# EAGLE board SparkX_Micro_NFC_RFID_Tag-Panel (EAGLE 9.6.2), part 1 of 2
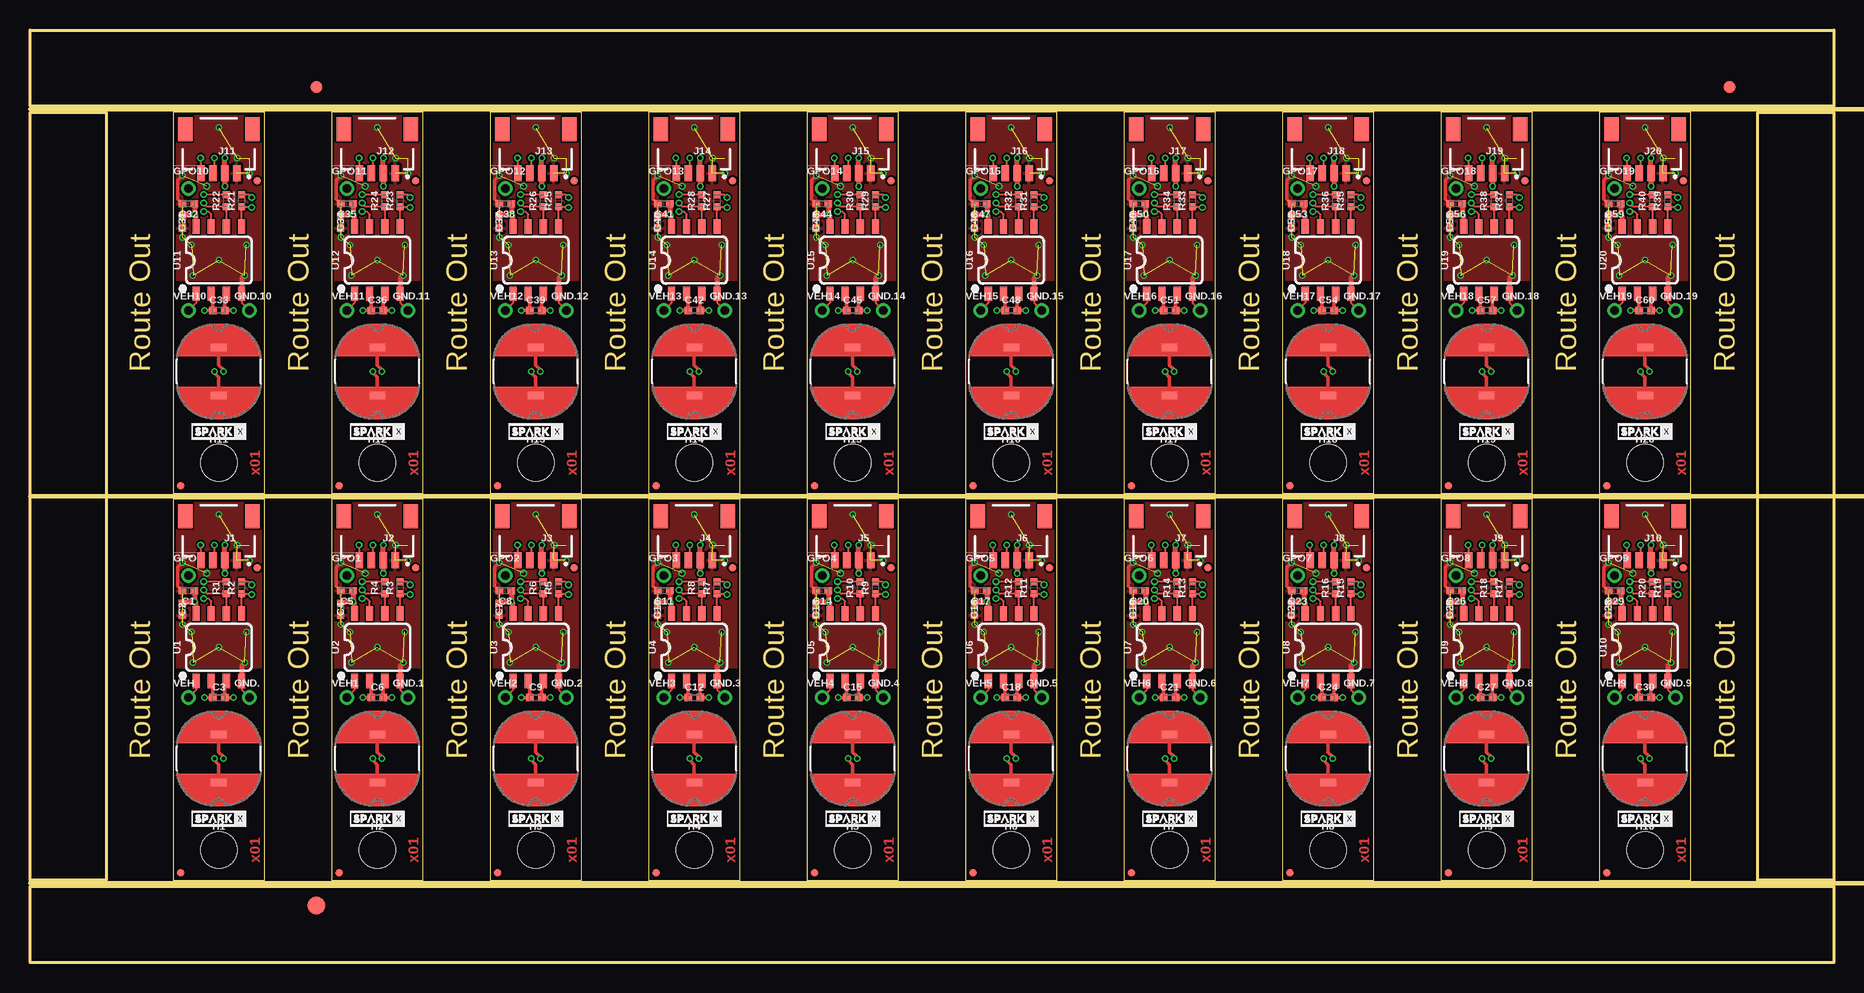
[diagram p0: board, top side]
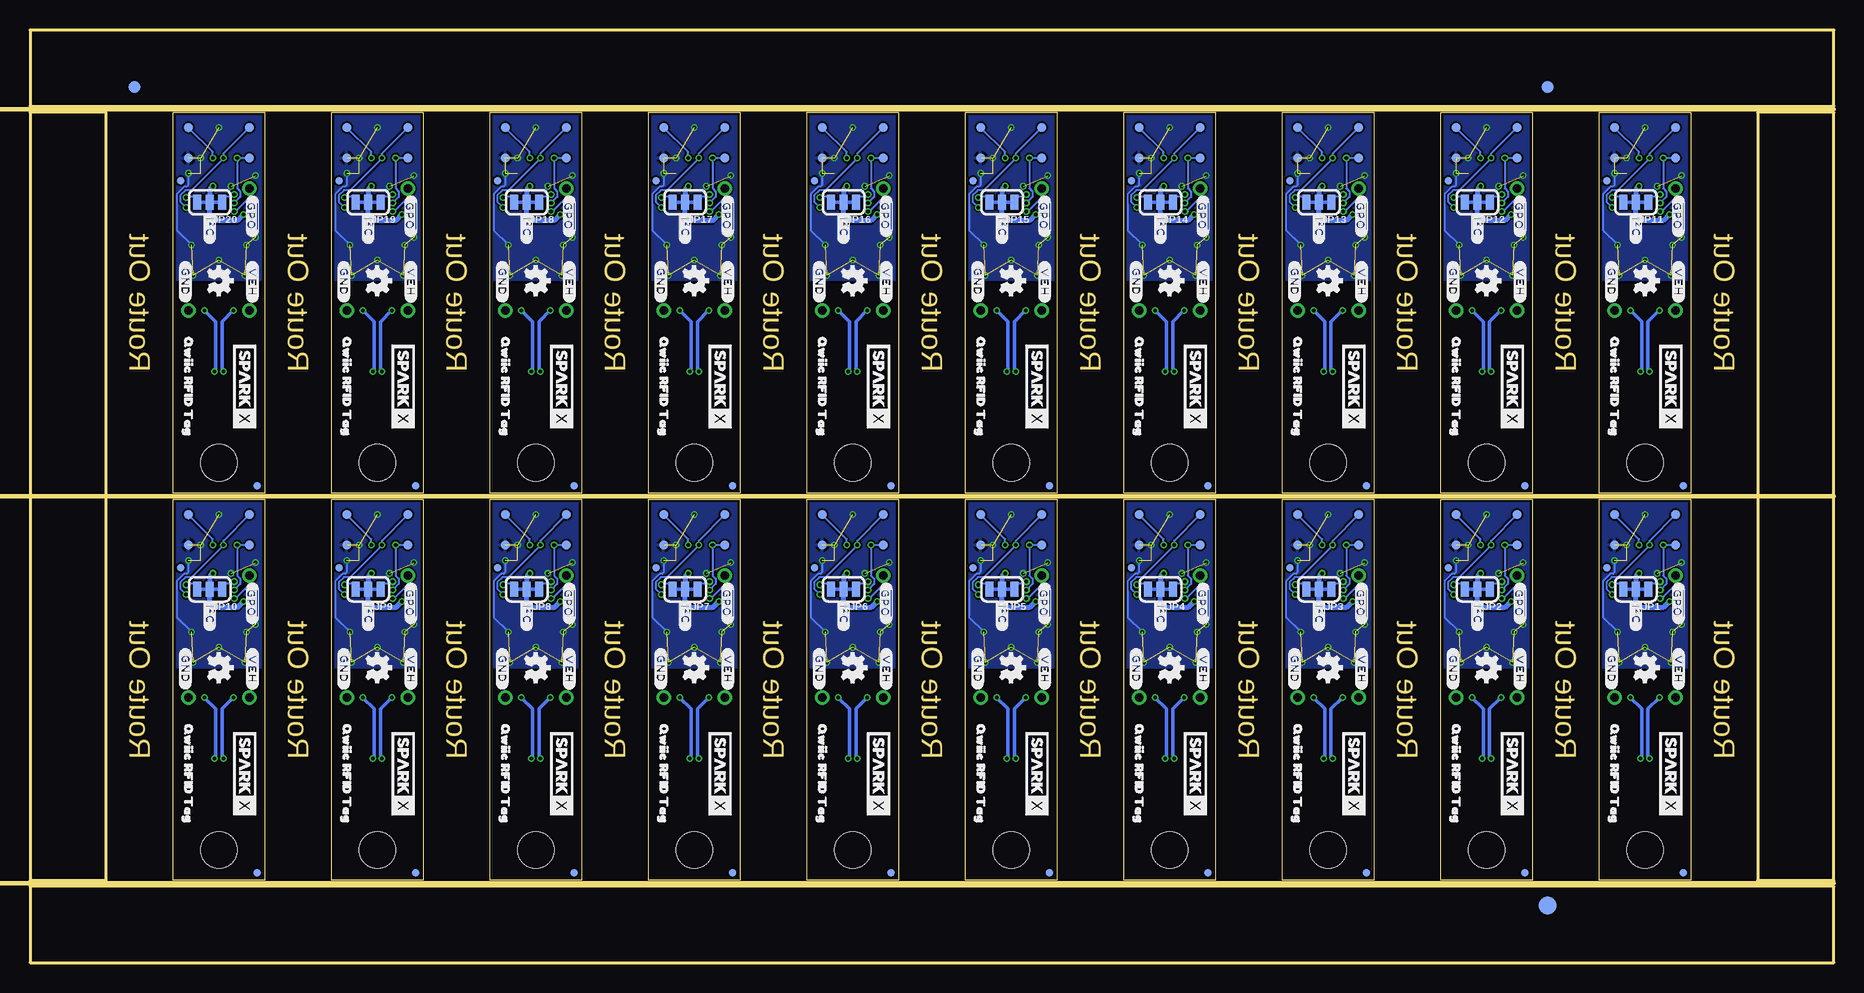
[diagram p1: board, bottom side, seen from below]

Size 150.37 x 77.72 mm. Coordinates in mm from the lower left corner, seen from the top.
Outline: 11.94,38.61 11.94,6.86 19.56,6.86 19.56,38.61 11.94,38.61
Outline: 25.15,38.61 25.15,6.86 32.77,6.86 32.77,38.61 25.15,38.61
Outline: 38.35,38.61 38.35,6.86 45.97,6.86 45.97,38.61 38.35,38.61
Outline: 51.56,38.61 51.56,6.86 59.18,6.86 59.18,38.61 51.56,38.61
Outline: 64.77,38.61 64.77,6.86 72.39,6.86 72.39,38.61 64.77,38.61
Outline: 77.98,38.61 77.98,6.86 85.6,6.86 85.6,38.61 77.98,38.61
Outline: 91.19,38.61 91.19,6.86 98.81,6.86 98.81,38.61 91.19,38.61
Outline: 104.39,38.61 104.39,6.86 112.01,6.86 112.01,38.61 104.39,38.61
Outline: 117.6,38.61 117.6,6.86 125.22,6.86 125.22,38.61 117.6,38.61
Outline: 130.81,38.61 130.81,6.86 138.43,6.86 138.43,38.61 130.81,38.61
Outline: 11.94,70.87 11.94,39.12 19.56,39.12 19.56,70.87 11.94,70.87
Outline: 25.15,70.87 25.15,39.12 32.77,39.12 32.77,70.87 25.15,70.87
Outline: 38.35,70.87 38.35,39.12 45.97,39.12 45.97,70.87 38.35,70.87
Outline: 51.56,70.87 51.56,39.12 59.18,39.12 59.18,70.87 51.56,70.87
Outline: 64.77,70.87 64.77,39.12 72.39,39.12 72.39,70.87 64.77,70.87
Outline: 77.98,70.87 77.98,39.12 85.6,39.12 85.6,70.87 77.98,70.87
Outline: 91.19,70.87 91.19,39.12 98.81,39.12 98.81,70.87 91.19,70.87
Outline: 104.39,70.87 104.39,39.12 112.01,39.12 112.01,70.87 104.39,70.87
Outline: 117.6,70.87 117.6,39.12 125.22,39.12 125.22,70.87 117.6,70.87
Outline: 130.81,70.87 130.81,39.12 138.43,39.12 138.43,70.87 130.81,70.87
Outline: 0,6.35 150.37,6.35 150.37,0 0,0 0,6.35
Outline: 144.02,70.87 150.37,70.87 150.37,6.86 144.02,6.86 144.02,70.87
Outline: 0,77.72 150.37,77.72 150.37,71.37 0,71.37 0,77.72
Outline: 0,70.87 6.35,70.87 6.35,6.86 0,6.86 0,70.87
Copper layers (1*16): Top 0.035mm / dielectric 1.5mm / Bottom 0.035mm
Design rules "SparkX_Micro_NFC_RFID_Tag": minimum track width 5mil, minimum drill 0.3mm, track to track 5mil, track to pad 5mil, pad to pad 5mil, via to via 5mil, smd to smd 5mil, copper to edge 7mil, drill to drill 7mil, minimum pad ring 5mil, minimum via ring 5mil, stop-mask expansion 2.5mil, vias tented up to drill 25mil, thermal gap 10mil
Milling: 3 lines

## Footprints (pad centres in the part's own frame; a part is rotated, then mirrored left to right if it is on the bottom)
PAD.03X.03 = smd 0.762 x 0.762: 1 0,0
1X01_1MM_NO_SILK = drill 0.7 pad 1.2: 1 0,0
W3102 = smd 1.27 x 0.635: 1 0,2; 2 0,-2
0402-TIGHT = smd 0.6 x 0.6: 1 -0.5,0; 2 0.5,0
FIDUCIAL-1X2 = smd 1 x 1: 1 0,0
FIDUCIAL-1.5X3 = smd 1.5 x 1.5: 1 0,0
FIDUCIAL-MICRO = smd 0.635 x 0.635: 1 0,0
STAND-OFF-TIGHT = hole 3.048: 0,0
JST04_1MM_RA = smd 0.6 x 1.35: 1 -1.5,0; 2 -0.5,0; 3 0.5,0; 4 1.5,0 | smd 1.2 x 2: NC1 2.8,-3.675; NC2 -2.8,-3.675
SMT-JUMPER_3_2-NC_TRACE_SILK = smd 0.66 x 1.27: 1 -1.041,0; 2 0,0; 3 1.041,0
SO08 = smd 0.6 x 1.2: 1 -1.905,-2.8; 2 -0.635,-2.8; 3 0.635,-2.8; 4 1.905,-2.8; 5 1.905,2.8; 6 0.635,2.8; 7 -0.635,2.8; 8 -1.905,2.8

## Placement (x,y rotation side)
3V1  TEST-POINT3  [PAD.03X.03]  31.5,37.34 0 bottom
3V2  TEST-POINT3  [PAD.03X.03]  44.7,37.34 0 bottom
3V3  TEST-POINT3  [PAD.03X.03]  18.29,37.34 0 bottom
3V4  TEST-POINT3  [PAD.03X.03]  57.91,37.34 0 bottom
3V5  TEST-POINT3  [PAD.03X.03]  71.12,37.34 0 bottom
3V6  TEST-POINT3  [PAD.03X.03]  84.33,37.34 0 bottom
3V7  TEST-POINT3  [PAD.03X.03]  97.54,37.34 0 bottom
3V8  TEST-POINT3  [PAD.03X.03]  110.74,37.34 0 bottom
3V9  TEST-POINT3  [PAD.03X.03]  123.95,37.34 0 bottom
3V10  TEST-POINT3  [PAD.03X.03]  137.16,37.34 0 bottom
3V11  TEST-POINT3  [PAD.03X.03]  18.29,69.6 0 bottom
3V12  TEST-POINT3  [PAD.03X.03]  31.5,69.6 0 bottom
3V13  TEST-POINT3  [PAD.03X.03]  44.7,69.6 0 bottom
3V14  TEST-POINT3  [PAD.03X.03]  57.91,69.6 0 bottom
3V15  TEST-POINT3  [PAD.03X.03]  71.12,69.6 0 bottom
3V16  TEST-POINT3  [PAD.03X.03]  84.33,69.6 0 bottom
3V17  TEST-POINT3  [PAD.03X.03]  97.54,69.6 0 bottom
3V18  TEST-POINT3  [PAD.03X.03]  110.74,69.6 0 bottom
3V19  TEST-POINT3  [PAD.03X.03]  123.95,69.6 0 bottom
3V20  TEST-POINT3  [PAD.03X.03]  137.16,69.6 0 bottom
!GPO!  [1X01_1MM_NO_SILK]  13.21,32.26 0 top
!GPO!1  [1X01_1MM_NO_SILK]  26.42,32.26 0 top
!GPO!2  [1X01_1MM_NO_SILK]  39.62,32.26 0 top
!GPO!3  [1X01_1MM_NO_SILK]  52.83,32.26 0 top
!GPO!4  [1X01_1MM_NO_SILK]  66.04,32.26 0 top
!GPO!5  [1X01_1MM_NO_SILK]  79.25,32.26 0 top
!GPO!6  [1X01_1MM_NO_SILK]  92.46,32.26 0 top
!GPO!7  [1X01_1MM_NO_SILK]  105.66,32.26 0 top
!GPO!8  [1X01_1MM_NO_SILK]  118.87,32.26 0 top
!GPO!9  [1X01_1MM_NO_SILK]  132.08,32.26 0 top
!GPO!10  [1X01_1MM_NO_SILK]  13.21,64.52 0 top
!GPO!11  [1X01_1MM_NO_SILK]  26.42,64.52 0 top
!GPO!12  [1X01_1MM_NO_SILK]  39.62,64.52 0 top
!GPO!13  [1X01_1MM_NO_SILK]  52.83,64.52 0 top
!GPO!14  [1X01_1MM_NO_SILK]  66.04,64.52 0 top
!GPO!15  [1X01_1MM_NO_SILK]  79.25,64.52 0 top
!GPO!16  [1X01_1MM_NO_SILK]  92.46,64.52 0 top
!GPO!17  [1X01_1MM_NO_SILK]  105.66,64.52 0 top
!GPO!18  [1X01_1MM_NO_SILK]  118.87,64.52 0 top
!GPO!19  [1X01_1MM_NO_SILK]  132.08,64.52 0 top
ANT  4.7μH  [W3102]  15.75,17.02 180 top
ANT1  4.7μH  [W3102]  28.96,17.02 180 top
ANT2  4.7μH  [W3102]  42.16,17.02 180 top
ANT3  4.7μH  [W3102]  55.37,17.02 180 top
ANT4  4.7μH  [W3102]  68.58,17.02 180 top
ANT5  4.7μH  [W3102]  81.79,17.02 180 top
ANT6  4.7μH  [W3102]  95,17.02 180 top
ANT7  4.7μH  [W3102]  108.2,17.02 180 top
ANT8  4.7μH  [W3102]  121.41,17.02 180 top
ANT9  4.7μH  [W3102]  134.62,17.02 180 top
ANT10  4.7μH  [W3102]  15.75,49.28 180 top
ANT11  4.7μH  [W3102]  28.96,49.28 180 top
ANT12  4.7μH  [W3102]  42.16,49.28 180 top
ANT13  4.7μH  [W3102]  55.37,49.28 180 top
ANT14  4.7μH  [W3102]  68.58,49.28 180 top
ANT15  4.7μH  [W3102]  81.79,49.28 180 top
ANT16  4.7μH  [W3102]  95,49.28 180 top
ANT17  4.7μH  [W3102]  108.2,49.28 180 top
ANT18  4.7μH  [W3102]  121.41,49.28 180 top
ANT19  4.7μH  [W3102]  134.62,49.28 180 top
C1  0.1uF  [0402-TIGHT]  13.21,30.99 180 top
C2  2.2uF  [0402-TIGHT]  12.7,29.46 270 top
C3  0.5pF  [0402-TIGHT]  15.75,22.1 0 top
C4  2.2uF  [0402-TIGHT]  25.91,29.46 270 top
C5  0.1uF  [0402-TIGHT]  26.42,30.99 180 top
C6  0.5pF  [0402-TIGHT]  28.96,22.1 0 top
C7  2.2uF  [0402-TIGHT]  39.12,29.46 270 top
C8  0.1uF  [0402-TIGHT]  39.62,30.99 180 top
C9  0.5pF  [0402-TIGHT]  42.16,22.1 0 top
C10  2.2uF  [0402-TIGHT]  52.32,29.46 270 top
C11  0.1uF  [0402-TIGHT]  52.83,30.99 180 top
C12  0.5pF  [0402-TIGHT]  55.37,22.1 0 top
C13  2.2uF  [0402-TIGHT]  65.53,29.46 270 top
C14  0.1uF  [0402-TIGHT]  66.04,30.99 180 top
C15  0.5pF  [0402-TIGHT]  68.58,22.1 0 top
C16  2.2uF  [0402-TIGHT]  78.74,29.46 270 top
C17  0.1uF  [0402-TIGHT]  79.25,30.99 180 top
C18  0.5pF  [0402-TIGHT]  81.79,22.1 0 top
C19  2.2uF  [0402-TIGHT]  91.95,29.46 270 top
C20  0.1uF  [0402-TIGHT]  92.46,30.99 180 top
C21  0.5pF  [0402-TIGHT]  95,22.1 0 top
C22  2.2uF  [0402-TIGHT]  105.16,29.46 270 top
C23  0.1uF  [0402-TIGHT]  105.66,30.99 180 top
C24  0.5pF  [0402-TIGHT]  108.2,22.1 0 top
C25  2.2uF  [0402-TIGHT]  118.36,29.46 270 top
C26  0.1uF  [0402-TIGHT]  118.87,30.99 180 top
C27  0.5pF  [0402-TIGHT]  121.41,22.1 0 top
C28  2.2uF  [0402-TIGHT]  131.57,29.46 270 top
C29  0.1uF  [0402-TIGHT]  132.08,30.99 180 top
C30  0.5pF  [0402-TIGHT]  134.62,22.1 0 top
C31  2.2uF  [0402-TIGHT]  12.7,61.72 270 top
C32  0.1uF  [0402-TIGHT]  13.21,63.25 180 top
C33  0.5pF  [0402-TIGHT]  15.75,54.36 0 top
C34  2.2uF  [0402-TIGHT]  25.91,61.72 270 top
C35  0.1uF  [0402-TIGHT]  26.42,63.25 180 top
C36  0.5pF  [0402-TIGHT]  28.96,54.36 0 top
C37  2.2uF  [0402-TIGHT]  39.12,61.72 270 top
C38  0.1uF  [0402-TIGHT]  39.62,63.25 180 top
C39  0.5pF  [0402-TIGHT]  42.16,54.36 0 top
C40  2.2uF  [0402-TIGHT]  52.32,61.72 270 top
C41  0.1uF  [0402-TIGHT]  52.83,63.25 180 top
C42  0.5pF  [0402-TIGHT]  55.37,54.36 0 top
C43  2.2uF  [0402-TIGHT]  65.53,61.72 270 top
C44  0.1uF  [0402-TIGHT]  66.04,63.25 180 top
C45  0.5pF  [0402-TIGHT]  68.58,54.36 0 top
C46  2.2uF  [0402-TIGHT]  78.74,61.72 270 top
C47  0.1uF  [0402-TIGHT]  79.25,63.25 180 top
C48  0.5pF  [0402-TIGHT]  81.79,54.36 0 top
C49  2.2uF  [0402-TIGHT]  91.95,61.72 270 top
C50  0.1uF  [0402-TIGHT]  92.46,63.25 180 top
C51  0.5pF  [0402-TIGHT]  95,54.36 0 top
C52  2.2uF  [0402-TIGHT]  105.16,61.72 270 top
C53  0.1uF  [0402-TIGHT]  105.66,63.25 180 top
C54  0.5pF  [0402-TIGHT]  108.2,54.36 0 top
C55  2.2uF  [0402-TIGHT]  118.36,61.72 270 top
C56  0.1uF  [0402-TIGHT]  118.87,63.25 180 top
C57  0.5pF  [0402-TIGHT]  121.41,54.36 0 top
C58  2.2uF  [0402-TIGHT]  131.57,61.72 270 top
C59  0.1uF  [0402-TIGHT]  132.08,63.25 180 top
C60  0.5pF  [0402-TIGHT]  134.62,54.36 0 top
E$1  [FIDUCIAL-1X2]  23.88,72.96 0 top
E$2  [FIDUCIAL-1X2]  23.88,72.96 0 bottom
E$3  [FIDUCIAL-1X2]  141.67,72.96 0 top
E$4  [FIDUCIAL-1X2]  141.67,72.96 0 bottom
E$5  [FIDUCIAL-1.5X3]  23.88,4.76 0 top
E$6  [FIDUCIAL-1.5X3]  23.88,4.76 0 bottom
FD1  FIDUCIALUFIDUCIAL  [FIDUCIAL-MICRO]  18.92,32.89 0 top
FD2  FIDUCIALUFIDUCIAL  [FIDUCIAL-MICRO]  18.92,32.89 0 bottom
FD3  FIDUCIALUFIDUCIAL  [FIDUCIAL-MICRO]  12.57,7.49 0 top
FD4  FIDUCIALUFIDUCIAL  [FIDUCIAL-MICRO]  12.57,7.49 0 bottom
FD5  FIDUCIALUFIDUCIAL  [FIDUCIAL-MICRO]  32.13,32.89 0 top
FD6  FIDUCIALUFIDUCIAL  [FIDUCIAL-MICRO]  32.13,32.89 0 bottom
FD7  FIDUCIALUFIDUCIAL  [FIDUCIAL-MICRO]  25.78,7.49 0 top
FD8  FIDUCIALUFIDUCIAL  [FIDUCIAL-MICRO]  25.78,7.49 0 bottom
FD9  FIDUCIALUFIDUCIAL  [FIDUCIAL-MICRO]  45.34,32.89 0 top
FD10  FIDUCIALUFIDUCIAL  [FIDUCIAL-MICRO]  45.34,32.89 0 bottom
FD11  FIDUCIALUFIDUCIAL  [FIDUCIAL-MICRO]  38.99,7.49 0 top
FD12  FIDUCIALUFIDUCIAL  [FIDUCIAL-MICRO]  38.99,7.49 0 bottom
FD13  FIDUCIALUFIDUCIAL  [FIDUCIAL-MICRO]  58.55,32.89 0 top
FD14  FIDUCIALUFIDUCIAL  [FIDUCIAL-MICRO]  58.55,32.89 0 bottom
FD15  FIDUCIALUFIDUCIAL  [FIDUCIAL-MICRO]  52.2,7.49 0 top
FD16  FIDUCIALUFIDUCIAL  [FIDUCIAL-MICRO]  52.2,7.49 0 bottom
FD17  FIDUCIALUFIDUCIAL  [FIDUCIAL-MICRO]  71.75,32.89 0 top
FD18  FIDUCIALUFIDUCIAL  [FIDUCIAL-MICRO]  71.75,32.89 0 bottom
FD19  FIDUCIALUFIDUCIAL  [FIDUCIAL-MICRO]  65.41,7.49 0 top
FD20  FIDUCIALUFIDUCIAL  [FIDUCIAL-MICRO]  65.41,7.49 0 bottom
FD21  FIDUCIALUFIDUCIAL  [FIDUCIAL-MICRO]  84.96,32.89 0 top
FD22  FIDUCIALUFIDUCIAL  [FIDUCIAL-MICRO]  84.96,32.89 0 bottom
FD23  FIDUCIALUFIDUCIAL  [FIDUCIAL-MICRO]  78.61,7.49 0 top
FD24  FIDUCIALUFIDUCIAL  [FIDUCIAL-MICRO]  78.61,7.49 0 bottom
FD25  FIDUCIALUFIDUCIAL  [FIDUCIAL-MICRO]  98.17,32.89 0 top
FD26  FIDUCIALUFIDUCIAL  [FIDUCIAL-MICRO]  98.17,32.89 0 bottom
FD27  FIDUCIALUFIDUCIAL  [FIDUCIAL-MICRO]  91.82,7.49 0 top
FD28  FIDUCIALUFIDUCIAL  [FIDUCIAL-MICRO]  91.82,7.49 0 bottom
FD29  FIDUCIALUFIDUCIAL  [FIDUCIAL-MICRO]  111.38,32.89 0 top
FD30  FIDUCIALUFIDUCIAL  [FIDUCIAL-MICRO]  111.38,32.89 0 bottom
FD31  FIDUCIALUFIDUCIAL  [FIDUCIAL-MICRO]  105.03,7.49 0 top
FD32  FIDUCIALUFIDUCIAL  [FIDUCIAL-MICRO]  105.03,7.49 0 bottom
FD33  FIDUCIALUFIDUCIAL  [FIDUCIAL-MICRO]  124.59,32.89 0 top
FD34  FIDUCIALUFIDUCIAL  [FIDUCIAL-MICRO]  124.59,32.89 0 bottom
FD35  FIDUCIALUFIDUCIAL  [FIDUCIAL-MICRO]  118.24,7.49 0 top
FD36  FIDUCIALUFIDUCIAL  [FIDUCIAL-MICRO]  118.24,7.49 0 bottom
FD37  FIDUCIALUFIDUCIAL  [FIDUCIAL-MICRO]  137.79,32.89 0 top
FD38  FIDUCIALUFIDUCIAL  [FIDUCIAL-MICRO]  137.79,32.89 0 bottom
FD39  FIDUCIALUFIDUCIAL  [FIDUCIAL-MICRO]  131.44,7.49 0 top
FD40  FIDUCIALUFIDUCIAL  [FIDUCIAL-MICRO]  131.44,7.49 0 bottom
FD41  FIDUCIALUFIDUCIAL  [FIDUCIAL-MICRO]  18.92,65.15 0 top
FD42  FIDUCIALUFIDUCIAL  [FIDUCIAL-MICRO]  18.92,65.15 0 bottom
FD43  FIDUCIALUFIDUCIAL  [FIDUCIAL-MICRO]  12.57,39.75 0 top
FD44  FIDUCIALUFIDUCIAL  [FIDUCIAL-MICRO]  12.57,39.75 0 bottom
FD45  FIDUCIALUFIDUCIAL  [FIDUCIAL-MICRO]  32.13,65.15 0 top
FD46  FIDUCIALUFIDUCIAL  [FIDUCIAL-MICRO]  32.13,65.15 0 bottom
FD47  FIDUCIALUFIDUCIAL  [FIDUCIAL-MICRO]  25.78,39.75 0 top
FD48  FIDUCIALUFIDUCIAL  [FIDUCIAL-MICRO]  25.78,39.75 0 bottom
FD49  FIDUCIALUFIDUCIAL  [FIDUCIAL-MICRO]  45.34,65.15 0 top
FD50  FIDUCIALUFIDUCIAL  [FIDUCIAL-MICRO]  45.34,65.15 0 bottom
FD51  FIDUCIALUFIDUCIAL  [FIDUCIAL-MICRO]  38.99,39.75 0 top
FD52  FIDUCIALUFIDUCIAL  [FIDUCIAL-MICRO]  38.99,39.75 0 bottom
FD53  FIDUCIALUFIDUCIAL  [FIDUCIAL-MICRO]  58.55,65.15 0 top
FD54  FIDUCIALUFIDUCIAL  [FIDUCIAL-MICRO]  58.55,65.15 0 bottom
FD55  FIDUCIALUFIDUCIAL  [FIDUCIAL-MICRO]  52.2,39.75 0 top
FD56  FIDUCIALUFIDUCIAL  [FIDUCIAL-MICRO]  52.2,39.75 0 bottom
FD57  FIDUCIALUFIDUCIAL  [FIDUCIAL-MICRO]  71.75,65.15 0 top
FD58  FIDUCIALUFIDUCIAL  [FIDUCIAL-MICRO]  71.75,65.15 0 bottom
FD59  FIDUCIALUFIDUCIAL  [FIDUCIAL-MICRO]  65.41,39.75 0 top
FD60  FIDUCIALUFIDUCIAL  [FIDUCIAL-MICRO]  65.41,39.75 0 bottom
FD61  FIDUCIALUFIDUCIAL  [FIDUCIAL-MICRO]  84.96,65.15 0 top
FD62  FIDUCIALUFIDUCIAL  [FIDUCIAL-MICRO]  84.96,65.15 0 bottom
FD63  FIDUCIALUFIDUCIAL  [FIDUCIAL-MICRO]  78.61,39.75 0 top
FD64  FIDUCIALUFIDUCIAL  [FIDUCIAL-MICRO]  78.61,39.75 0 bottom
FD65  FIDUCIALUFIDUCIAL  [FIDUCIAL-MICRO]  98.17,65.15 0 top
FD66  FIDUCIALUFIDUCIAL  [FIDUCIAL-MICRO]  98.17,65.15 0 bottom
FD67  FIDUCIALUFIDUCIAL  [FIDUCIAL-MICRO]  91.82,39.75 0 top
FD68  FIDUCIALUFIDUCIAL  [FIDUCIAL-MICRO]  91.82,39.75 0 bottom
FD69  FIDUCIALUFIDUCIAL  [FIDUCIAL-MICRO]  111.38,65.15 0 top
FD70  FIDUCIALUFIDUCIAL  [FIDUCIAL-MICRO]  111.38,65.15 0 bottom
FD71  FIDUCIALUFIDUCIAL  [FIDUCIAL-MICRO]  105.03,39.75 0 top
FD72  FIDUCIALUFIDUCIAL  [FIDUCIAL-MICRO]  105.03,39.75 0 bottom
FD73  FIDUCIALUFIDUCIAL  [FIDUCIAL-MICRO]  124.59,65.15 0 top
FD74  FIDUCIALUFIDUCIAL  [FIDUCIAL-MICRO]  124.59,65.15 0 bottom
FD75  FIDUCIALUFIDUCIAL  [FIDUCIAL-MICRO]  118.24,39.75 0 top
FD76  FIDUCIALUFIDUCIAL  [FIDUCIAL-MICRO]  118.24,39.75 0 bottom
FD77  FIDUCIALUFIDUCIAL  [FIDUCIAL-MICRO]  137.79,65.15 0 top
FD78  FIDUCIALUFIDUCIAL  [FIDUCIAL-MICRO]  137.79,65.15 0 bottom
FD79  FIDUCIALUFIDUCIAL  [FIDUCIAL-MICRO]  131.44,39.75 0 top
FD80  FIDUCIALUFIDUCIAL  [FIDUCIAL-MICRO]  131.44,39.75 0 bottom
GND  TEST-POINT3  [PAD.03X.03]  18.29,34.8 0 bottom
GND1  TEST-POINT3  [PAD.03X.03]  31.5,34.8 0 bottom
GND2  TEST-POINT3  [PAD.03X.03]  44.7,34.8 0 bottom
GND3  TEST-POINT3  [PAD.03X.03]  57.91,34.8 0 bottom
GND4  TEST-POINT3  [PAD.03X.03]  71.12,34.8 0 bottom
GND5  TEST-POINT3  [PAD.03X.03]  84.33,34.8 0 bottom
GND6  TEST-POINT3  [PAD.03X.03]  97.54,34.8 0 bottom
GND7  TEST-POINT3  [PAD.03X.03]  110.74,34.8 0 bottom
GND8  TEST-POINT3  [PAD.03X.03]  123.95,34.8 0 bottom
GND9  TEST-POINT3  [PAD.03X.03]  137.16,34.8 0 bottom
GND10  TEST-POINT3  [PAD.03X.03]  18.29,67.06 0 bottom
GND11  TEST-POINT3  [PAD.03X.03]  31.5,67.06 0 bottom
GND12  TEST-POINT3  [PAD.03X.03]  44.7,67.06 0 bottom
GND13  TEST-POINT3  [PAD.03X.03]  57.91,67.06 0 bottom
GND14  TEST-POINT3  [PAD.03X.03]  71.12,67.06 0 bottom
GND15  TEST-POINT3  [PAD.03X.03]  84.33,67.06 0 bottom
GND16  TEST-POINT3  [PAD.03X.03]  97.54,67.06 0 bottom
GND17  TEST-POINT3  [PAD.03X.03]  110.74,67.06 0 bottom
GND18  TEST-POINT3  [PAD.03X.03]  123.95,67.06 0 bottom
GND19  TEST-POINT3  [PAD.03X.03]  137.16,67.06 0 bottom
GND.  [1X01_1MM_NO_SILK]  18.29,22.1 0 top
GND.1  [1X01_1MM_NO_SILK]  31.5,22.1 0 top
GND.2  [1X01_1MM_NO_SILK]  44.7,22.1 0 top
GND.3  [1X01_1MM_NO_SILK]  57.91,22.1 0 top
GND.4  [1X01_1MM_NO_SILK]  71.12,22.1 0 top
GND.5  [1X01_1MM_NO_SILK]  84.33,22.1 0 top
GND.6  [1X01_1MM_NO_SILK]  97.54,22.1 0 top
GND.7  [1X01_1MM_NO_SILK]  110.74,22.1 0 top
GND.8  [1X01_1MM_NO_SILK]  123.95,22.1 0 top
GND.9  [1X01_1MM_NO_SILK]  137.16,22.1 0 top
GND.10  [1X01_1MM_NO_SILK]  18.29,54.36 0 top
GND.11  [1X01_1MM_NO_SILK]  31.5,54.36 0 top
GND.12  [1X01_1MM_NO_SILK]  44.7,54.36 0 top
GND.13  [1X01_1MM_NO_SILK]  57.91,54.36 0 top
GND.14  [1X01_1MM_NO_SILK]  71.12,54.36 0 top
GND.15  [1X01_1MM_NO_SILK]  84.33,54.36 0 top
GND.16  [1X01_1MM_NO_SILK]  97.54,54.36 0 top
GND.17  [1X01_1MM_NO_SILK]  110.74,54.36 0 top
GND.18  [1X01_1MM_NO_SILK]  123.95,54.36 0 top
GND.19  [1X01_1MM_NO_SILK]  137.16,54.36 0 top
H1  STAND-OFFTIGHT  [STAND-OFF-TIGHT]  15.75,9.4 0 top
H2  STAND-OFFTIGHT  [STAND-OFF-TIGHT]  28.96,9.4 0 top
H3  STAND-OFFTIGHT  [STAND-OFF-TIGHT]  42.16,9.4 0 top
H4  STAND-OFFTIGHT  [STAND-OFF-TIGHT]  55.37,9.4 0 top
H5  STAND-OFFTIGHT  [STAND-OFF-TIGHT]  68.58,9.4 0 top
H6  STAND-OFFTIGHT  [STAND-OFF-TIGHT]  81.79,9.4 0 top
H7  STAND-OFFTIGHT  [STAND-OFF-TIGHT]  95,9.4 0 top
H8  STAND-OFFTIGHT  [STAND-OFF-TIGHT]  108.2,9.4 0 top
H9  STAND-OFFTIGHT  [STAND-OFF-TIGHT]  121.41,9.4 0 top
H10  STAND-OFFTIGHT  [STAND-OFF-TIGHT]  134.62,9.4 0 top
H11  STAND-OFFTIGHT  [STAND-OFF-TIGHT]  15.75,41.66 0 top
H12  STAND-OFFTIGHT  [STAND-OFF-TIGHT]  28.96,41.66 0 top
H13  STAND-OFFTIGHT  [STAND-OFF-TIGHT]  42.16,41.66 0 top
H14  STAND-OFFTIGHT  [STAND-OFF-TIGHT]  55.37,41.66 0 top
H15  STAND-OFFTIGHT  [STAND-OFF-TIGHT]  68.58,41.66 0 top
H16  STAND-OFFTIGHT  [STAND-OFF-TIGHT]  81.79,41.66 0 top
H17  STAND-OFFTIGHT  [STAND-OFF-TIGHT]  95,41.66 0 top
H18  STAND-OFFTIGHT  [STAND-OFF-TIGHT]  108.2,41.66 0 top
H19  STAND-OFFTIGHT  [STAND-OFF-TIGHT]  121.41,41.66 0 top
H20  STAND-OFFTIGHT  [STAND-OFF-TIGHT]  134.62,41.66 0 top
J1  QWIIC_RIGHT_ANGLE  [JST04_1MM_RA]  15.75,33.53 180 top
J2  QWIIC_RIGHT_ANGLE  [JST04_1MM_RA]  28.96,33.53 180 top
J3  QWIIC_RIGHT_ANGLE  [JST04_1MM_RA]  42.16,33.53 180 top
J4  QWIIC_RIGHT_ANGLE  [JST04_1MM_RA]  55.37,33.53 180 top
J5  QWIIC_RIGHT_ANGLE  [JST04_1MM_RA]  68.58,33.53 180 top
J6  QWIIC_RIGHT_ANGLE  [JST04_1MM_RA]  81.79,33.53 180 top
J7  QWIIC_RIGHT_ANGLE  [JST04_1MM_RA]  95,33.53 180 top
J8  QWIIC_RIGHT_ANGLE  [JST04_1MM_RA]  108.2,33.53 180 top
J9  QWIIC_RIGHT_ANGLE  [JST04_1MM_RA]  121.41,33.53 180 top
J10  QWIIC_RIGHT_ANGLE  [JST04_1MM_RA]  134.62,33.53 180 top
J11  QWIIC_RIGHT_ANGLE  [JST04_1MM_RA]  15.75,65.79 180 top
J12  QWIIC_RIGHT_ANGLE  [JST04_1MM_RA]  28.96,65.79 180 top
J13  QWIIC_RIGHT_ANGLE  [JST04_1MM_RA]  42.16,65.79 180 top
J14  QWIIC_RIGHT_ANGLE  [JST04_1MM_RA]  55.37,65.79 180 top
J15  QWIIC_RIGHT_ANGLE  [JST04_1MM_RA]  68.58,65.79 180 top
J16  QWIIC_RIGHT_ANGLE  [JST04_1MM_RA]  81.79,65.79 180 top
J17  QWIIC_RIGHT_ANGLE  [JST04_1MM_RA]  95,65.79 180 top
J18  QWIIC_RIGHT_ANGLE  [JST04_1MM_RA]  108.2,65.79 180 top
J19  QWIIC_RIGHT_ANGLE  [JST04_1MM_RA]  121.41,65.79 180 top
J20  QWIIC_RIGHT_ANGLE  [JST04_1MM_RA]  134.62,65.79 180 top
JP1  JUMPER-SMT_3_2-NC_TRACE_SILK  [SMT-JUMPER_3_2-NC_TRACE_SILK]  16.51,31.12 180 bottom
JP2  JUMPER-SMT_3_2-NC_TRACE_SILK  [SMT-JUMPER_3_2-NC_TRACE_SILK]  29.72,31.12 180 bottom
JP3  JUMPER-SMT_3_2-NC_TRACE_SILK  [SMT-JUMPER_3_2-NC_TRACE_SILK]  42.93,31.12 180 bottom
JP4  JUMPER-SMT_3_2-NC_TRACE_SILK  [SMT-JUMPER_3_2-NC_TRACE_SILK]  56.13,31.12 180 bottom
JP5  JUMPER-SMT_3_2-NC_TRACE_SILK  [SMT-JUMPER_3_2-NC_TRACE_SILK]  69.34,31.12 180 bottom
JP6  JUMPER-SMT_3_2-NC_TRACE_SILK  [SMT-JUMPER_3_2-NC_TRACE_SILK]  82.55,31.12 180 bottom
JP7  JUMPER-SMT_3_2-NC_TRACE_SILK  [SMT-JUMPER_3_2-NC_TRACE_SILK]  95.76,31.12 180 bottom
JP8  JUMPER-SMT_3_2-NC_TRACE_SILK  [SMT-JUMPER_3_2-NC_TRACE_SILK]  108.97,31.12 180 bottom
JP9  JUMPER-SMT_3_2-NC_TRACE_SILK  [SMT-JUMPER_3_2-NC_TRACE_SILK]  122.17,31.12 180 bottom
JP10  JUMPER-SMT_3_2-NC_TRACE_SILK  [SMT-JUMPER_3_2-NC_TRACE_SILK]  135.38,31.12 180 bottom
JP11  JUMPER-SMT_3_2-NC_TRACE_SILK  [SMT-JUMPER_3_2-NC_TRACE_SILK]  16.51,63.37 180 bottom
JP12  JUMPER-SMT_3_2-NC_TRACE_SILK  [SMT-JUMPER_3_2-NC_TRACE_SILK]  29.72,63.37 180 bottom
JP13  JUMPER-SMT_3_2-NC_TRACE_SILK  [SMT-JUMPER_3_2-NC_TRACE_SILK]  42.93,63.37 180 bottom
JP14  JUMPER-SMT_3_2-NC_TRACE_SILK  [SMT-JUMPER_3_2-NC_TRACE_SILK]  56.13,63.37 180 bottom
JP15  JUMPER-SMT_3_2-NC_TRACE_SILK  [SMT-JUMPER_3_2-NC_TRACE_SILK]  69.34,63.37 180 bottom
JP16  JUMPER-SMT_3_2-NC_TRACE_SILK  [SMT-JUMPER_3_2-NC_TRACE_SILK]  82.55,63.37 180 bottom
JP17  JUMPER-SMT_3_2-NC_TRACE_SILK  [SMT-JUMPER_3_2-NC_TRACE_SILK]  95.76,63.37 180 bottom
JP18  JUMPER-SMT_3_2-NC_TRACE_SILK  [SMT-JUMPER_3_2-NC_TRACE_SILK]  108.97,63.37 180 bottom
JP19  JUMPER-SMT_3_2-NC_TRACE_SILK  [SMT-JUMPER_3_2-NC_TRACE_SILK]  122.17,63.37 180 bottom
JP20  JUMPER-SMT_3_2-NC_TRACE_SILK  [SMT-JUMPER_3_2-NC_TRACE_SILK]  135.38,63.37 180 bottom
LOGO1  OSHW-LOGOMINI  [OSHW-LOGO-MINI]  28.96,24.57 270 bottom
LOGO2  OSHW-LOGOMINI  [OSHW-LOGO-MINI]  15.75,24.57 270 bottom
LOGO3  OSHW-LOGOMINI  [OSHW-LOGO-MINI]  42.16,24.57 270 bottom
LOGO4  OSHW-LOGOMINI  [OSHW-LOGO-MINI]  55.37,24.57 270 bottom
LOGO5  OSHW-LOGOMINI  [OSHW-LOGO-MINI]  68.58,24.57 270 bottom
LOGO6  OSHW-LOGOMINI  [OSHW-LOGO-MINI]  81.79,24.57 270 bottom
LOGO7  OSHW-LOGOMINI  [OSHW-LOGO-MINI]  95,24.57 270 bottom
LOGO8  OSHW-LOGOMINI  [OSHW-LOGO-MINI]  108.2,24.57 270 bottom
LOGO9  OSHW-LOGOMINI  [OSHW-LOGO-MINI]  121.41,24.57 270 bottom
LOGO10  OSHW-LOGOMINI  [OSHW-LOGO-MINI]  134.62,24.57 270 bottom
LOGO11  OSHW-LOGOMINI  [OSHW-LOGO-MINI]  15.75,56.83 270 bottom
LOGO12  OSHW-LOGOMINI  [OSHW-LOGO-MINI]  28.96,56.83 270 bottom
LOGO13  OSHW-LOGOMINI  [OSHW-LOGO-MINI]  42.16,56.83 270 bottom
LOGO14  OSHW-LOGOMINI  [OSHW-LOGO-MINI]  55.37,56.83 270 bottom
LOGO15  OSHW-LOGOMINI  [OSHW-LOGO-MINI]  68.58,56.83 270 bottom
LOGO16  OSHW-LOGOMINI  [OSHW-LOGO-MINI]  81.79,56.83 270 bottom
LOGO17  OSHW-LOGOMINI  [OSHW-LOGO-MINI]  95,56.83 270 bottom
LOGO18  OSHW-LOGOMINI  [OSHW-LOGO-MINI]  108.2,56.83 270 bottom
LOGO19  OSHW-LOGOMINI  [OSHW-LOGO-MINI]  121.41,56.83 270 bottom
LOGO20  OSHW-LOGOMINI  [OSHW-LOGO-MINI]  134.62,56.83 270 bottom
R1  2.2k  [0402-TIGHT]  16.38,31.24 90 top
R2  2.2k  [0402-TIGHT]  17.65,31.24 90 top
R3  2.2k  [0402-TIGHT]  30.86,31.24 90 top
R4  2.2k  [0402-TIGHT]  29.59,31.24 90 top
R5  2.2k  [0402-TIGHT]  44.07,31.24 90 top
R6  2.2k  [0402-TIGHT]  42.8,31.24 90 top
R7  2.2k  [0402-TIGHT]  57.28,31.24 90 top
R8  2.2k  [0402-TIGHT]  56.01,31.24 90 top
R9  2.2k  [0402-TIGHT]  70.48,31.24 90 top
R10  2.2k  [0402-TIGHT]  69.22,31.24 90 top
R11  2.2k  [0402-TIGHT]  83.69,31.24 90 top
R12  2.2k  [0402-TIGHT]  82.42,31.24 90 top
R13  2.2k  [0402-TIGHT]  96.9,31.24 90 top
R14  2.2k  [0402-TIGHT]  95.63,31.24 90 top
R15  2.2k  [0402-TIGHT]  110.11,31.24 90 top
R16  2.2k  [0402-TIGHT]  108.84,31.24 90 top
R17  2.2k  [0402-TIGHT]  123.32,31.24 90 top
R18  2.2k  [0402-TIGHT]  122.05,31.24 90 top
R19  2.2k  [0402-TIGHT]  136.53,31.24 90 top
R20  2.2k  [0402-TIGHT]  135.25,31.24 90 top
R21  2.2k  [0402-TIGHT]  17.65,63.5 90 top
R22  2.2k  [0402-TIGHT]  16.38,63.5 90 top
R23  2.2k  [0402-TIGHT]  30.86,63.5 90 top
R24  2.2k  [0402-TIGHT]  29.59,63.5 90 top
R25  2.2k  [0402-TIGHT]  44.07,63.5 90 top
R26  2.2k  [0402-TIGHT]  42.8,63.5 90 top
R27  2.2k  [0402-TIGHT]  57.28,63.5 90 top
R28  2.2k  [0402-TIGHT]  56.01,63.5 90 top
R29  2.2k  [0402-TIGHT]  70.48,63.5 90 top
R30  2.2k  [0402-TIGHT]  69.22,63.5 90 top
R31  2.2k  [0402-TIGHT]  83.69,63.5 90 top
R32  2.2k  [0402-TIGHT]  82.42,63.5 90 top
R33  2.2k  [0402-TIGHT]  96.9,63.5 90 top
R34  2.2k  [0402-TIGHT]  95.63,63.5 90 top
R35  2.2k  [0402-TIGHT]  110.11,63.5 90 top
R36  2.2k  [0402-TIGHT]  108.84,63.5 90 top
R37  2.2k  [0402-TIGHT]  123.32,63.5 90 top
R38  2.2k  [0402-TIGHT]  122.05,63.5 90 top
R39  2.2k  [0402-TIGHT]  136.53,63.5 90 top
R40  2.2k  [0402-TIGHT]  135.25,63.5 90 top
SCL  TEST-POINT3  [PAD.03X.03]  13.21,34.8 0 bottom
SCL1  TEST-POINT3  [PAD.03X.03]  26.42,34.8 0 bottom
SCL2  TEST-POINT3  [PAD.03X.03]  39.62,34.8 0 bottom
SCL3  TEST-POINT3  [PAD.03X.03]  52.83,34.8 0 bottom
SCL4  TEST-POINT3  [PAD.03X.03]  66.04,34.8 0 bottom
SCL5  TEST-POINT3  [PAD.03X.03]  79.25,34.8 0 bottom
SCL6  TEST-POINT3  [PAD.03X.03]  92.46,34.8 0 bottom
SCL7  TEST-POINT3  [PAD.03X.03]  105.66,34.8 0 bottom
SCL8  TEST-POINT3  [PAD.03X.03]  118.87,34.8 0 bottom
SCL9  TEST-POINT3  [PAD.03X.03]  132.08,34.8 0 bottom
SCL10  TEST-POINT3  [PAD.03X.03]  13.21,67.06 0 bottom
SCL11  TEST-POINT3  [PAD.03X.03]  26.42,67.06 0 bottom
SCL12  TEST-POINT3  [PAD.03X.03]  39.62,67.06 0 bottom
SCL13  TEST-POINT3  [PAD.03X.03]  52.83,67.06 0 bottom
SCL14  TEST-POINT3  [PAD.03X.03]  66.04,67.06 0 bottom
SCL15  TEST-POINT3  [PAD.03X.03]  79.25,67.06 0 bottom
SCL16  TEST-POINT3  [PAD.03X.03]  92.46,67.06 0 bottom
SCL17  TEST-POINT3  [PAD.03X.03]  105.66,67.06 0 bottom
SCL18  TEST-POINT3  [PAD.03X.03]  118.87,67.06 0 bottom
SCL19  TEST-POINT3  [PAD.03X.03]  132.08,67.06 0 bottom
SDA  TEST-POINT3  [PAD.03X.03]  13.21,37.34 0 bottom
SDA1  TEST-POINT3  [PAD.03X.03]  26.42,37.34 0 bottom
SDA2  TEST-POINT3  [PAD.03X.03]  39.62,37.34 0 bottom
SDA3  TEST-POINT3  [PAD.03X.03]  52.83,37.34 0 bottom
SDA4  TEST-POINT3  [PAD.03X.03]  66.04,37.34 0 bottom
SDA5  TEST-POINT3  [PAD.03X.03]  79.25,37.34 0 bottom
SDA6  TEST-POINT3  [PAD.03X.03]  92.46,37.34 0 bottom
SDA7  TEST-POINT3  [PAD.03X.03]  105.66,37.34 0 bottom
SDA8  TEST-POINT3  [PAD.03X.03]  118.87,37.34 0 bottom
SDA9  TEST-POINT3  [PAD.03X.03]  132.08,37.34 0 bottom
SDA10  TEST-POINT3  [PAD.03X.03]  13.21,69.6 0 bottom
SDA11  TEST-POINT3  [PAD.03X.03]  26.42,69.6 0 bottom
SDA12  TEST-POINT3  [PAD.03X.03]  39.62,69.6 0 bottom
SDA13  TEST-POINT3  [PAD.03X.03]  52.83,69.6 0 bottom
SDA14  TEST-POINT3  [PAD.03X.03]  66.04,69.6 0 bottom
SDA15  TEST-POINT3  [PAD.03X.03]  79.25,69.6 0 bottom
SDA16  TEST-POINT3  [PAD.03X.03]  92.46,69.6 0 bottom
SDA17  TEST-POINT3  [PAD.03X.03]  105.66,69.6 0 bottom
SDA18  TEST-POINT3  [PAD.03X.03]  118.87,69.6 0 bottom
SDA19  TEST-POINT3  [PAD.03X.03]  132.08,69.6 0 bottom
U1  ST25DV64KC  [SO08]  15.75,26.29 0 top
U2  ST25DV64KC  [SO08]  28.96,26.29 0 top
U3  ST25DV64KC  [SO08]  42.16,26.29 0 top
U4  ST25DV64KC  [SO08]  55.37,26.29 0 top
U5  ST25DV64KC  [SO08]  68.58,26.29 0 top
U6  ST25DV64KC  [SO08]  81.79,26.29 0 top
U7  ST25DV64KC  [SO08]  95,26.29 0 top
U8  ST25DV64KC  [SO08]  108.2,26.29 0 top
U9  ST25DV64KC  [SO08]  121.41,26.29 0 top
U10  ST25DV64KC  [SO08]  134.62,26.29 0 top
U11  ST25DV64KC  [SO08]  15.75,58.55 0 top
U12  ST25DV64KC  [SO08]  28.96,58.55 0 top
U13  ST25DV64KC  [SO08]  42.16,58.55 0 top
U14  ST25DV64KC  [SO08]  55.37,58.55 0 top
U15  ST25DV64KC  [SO08]  68.58,58.55 0 top
U16  ST25DV64KC  [SO08]  81.79,58.55 0 top
U17  ST25DV64KC  [SO08]  95,58.55 0 top
U18  ST25DV64KC  [SO08]  108.2,58.55 0 top
U19  ST25DV64KC  [SO08]  121.41,58.55 0 top
U20  ST25DV64KC  [SO08]  134.62,58.55 0 top
U$1  SPARKX-LOGO2  [SPARKX-TINY]  15.75,12 0 top
U$2  [##GPO##0]  12.95,31.62 270 bottom
U$3  [QWIIC_RFID_TAG0]  18.29,15.75 270 bottom
U$4  [#VEH#0]  12.95,26.16 270 bottom
U$5  [#I�C#0]  16.51,30.35 270 bottom
U$6  [#GND#0]  18.54,26.16 270 bottom
U$7  SPARKX-LOGO2  [SPARKX-TINY]  28.96,12 0 top
U$8  SPARKX-LOGO3  [SPARKX-SMALL]  26.8,15.75 270 bottom
U$9  [#I�C#0]  29.72,30.35 270 bottom
U$10  [##GPO##0]  26.16,31.62 270 bottom
U$11  [#VEH#0]  26.16,26.16 270 bottom
U$12  [#GND#0]  31.75,26.16 270 bottom
U$13  [QWIIC_RFID_TAG0]  31.5,15.75 270 bottom
U$14  SPARKX-LOGO2  [SPARKX-TINY]  42.16,12 0 top
U$15  SPARKX-LOGO3  [SPARKX-SMALL]  40.01,15.75 270 bottom
U$16  [#I�C#0]  42.93,30.35 270 bottom
U$17  [##GPO##0]  39.37,31.62 270 bottom
U$18  [#VEH#0]  39.37,26.16 270 bottom
U$19  [#GND#0]  44.96,26.16 270 bottom
U$20  SPARKX-LOGO3  [SPARKX-SMALL]  13.59,15.75 270 bottom
U$21  [QWIIC_RFID_TAG0]  44.7,15.75 270 bottom
U$22  SPARKX-LOGO2  [SPARKX-TINY]  55.37,12 0 top
U$23  SPARKX-LOGO3  [SPARKX-SMALL]  53.21,15.75 270 bottom
U$24  [#I�C#0]  56.13,30.35 270 bottom
U$25  [##GPO##0]  52.58,31.62 270 bottom
U$26  [#VEH#0]  52.58,26.16 270 bottom
U$27  [#GND#0]  58.17,26.16 270 bottom
U$28  [QWIIC_RFID_TAG0]  57.91,15.75 270 bottom
U$29  SPARKX-LOGO2  [SPARKX-TINY]  68.58,12 0 top
U$30  SPARKX-LOGO3  [SPARKX-SMALL]  66.42,15.75 270 bottom
U$31  [#I�C#0]  69.34,30.35 270 bottom
U$32  [##GPO##0]  65.79,31.62 270 bottom
U$33  [#VEH#0]  65.79,26.16 270 bottom
U$34  [#GND#0]  71.37,26.16 270 bottom
U$35  [QWIIC_RFID_TAG0]  71.12,15.75 270 bottom
U$36  SPARKX-LOGO2  [SPARKX-TINY]  81.79,12 0 top
U$37  SPARKX-LOGO3  [SPARKX-SMALL]  79.63,15.75 270 bottom
U$38  [#I�C#0]  82.55,30.35 270 bottom
U$39  [##GPO##0]  78.99,31.62 270 bottom
U$40  [#VEH#0]  78.99,26.16 270 bottom
U$41  [#GND#0]  84.58,26.16 270 bottom
U$42  [QWIIC_RFID_TAG0]  84.33,15.75 270 bottom
U$43  SPARKX-LOGO2  [SPARKX-TINY]  95,12 0 top
U$44  SPARKX-LOGO3  [SPARKX-SMALL]  92.84,15.75 270 bottom
U$45  [#I�C#0]  95.76,30.35 270 bottom
U$46  [##GPO##0]  92.2,31.62 270 bottom
U$47  [#VEH#0]  92.2,26.16 270 bottom
U$48  [#GND#0]  97.79,26.16 270 bottom
U$49  [QWIIC_RFID_TAG0]  97.54,15.75 270 bottom
U$50  SPARKX-LOGO2  [SPARKX-TINY]  108.2,12 0 top
U$51  SPARKX-LOGO3  [SPARKX-SMALL]  106.05,15.75 270 bottom
U$52  [#I�C#0]  108.97,30.35 270 bottom
U$53  [##GPO##0]  105.41,31.62 270 bottom
U$54  [#VEH#0]  105.41,26.16 270 bottom
U$55  [#GND#0]  111,26.16 270 bottom
U$56  [QWIIC_RFID_TAG0]  110.74,15.75 270 bottom
U$57  SPARKX-LOGO2  [SPARKX-TINY]  121.41,12 0 top
U$58  SPARKX-LOGO3  [SPARKX-SMALL]  119.25,15.75 270 bottom
U$59  [#I�C#0]  122.17,30.35 270 bottom
U$60  [##GPO##0]  118.62,31.62 270 bottom
U$61  [#VEH#0]  118.62,26.16 270 bottom
U$62  [#GND#0]  124.21,26.16 270 bottom
U$63  [QWIIC_RFID_TAG0]  123.95,15.75 270 bottom
U$64  SPARKX-LOGO2  [SPARKX-TINY]  134.62,12 0 top
U$65  SPARKX-LOGO3  [SPARKX-SMALL]  132.46,15.75 270 bottom
U$66  [#I�C#0]  135.38,30.35 270 bottom
U$67  [##GPO##0]  131.83,31.62 270 bottom
U$68  [#VEH#0]  131.83,26.16 270 bottom
U$69  [#GND#0]  137.41,26.16 270 bottom
U$70  [QWIIC_RFID_TAG0]  137.16,15.75 270 bottom
U$71  SPARKX-LOGO2  [SPARKX-TINY]  15.75,44.26 0 top
U$72  SPARKX-LOGO3  [SPARKX-SMALL]  13.59,48.01 270 bottom
U$73  [#I�C#0]  16.51,62.61 270 bottom
U$74  [##GPO##0]  12.95,63.88 270 bottom
U$75  [#VEH#0]  12.95,58.42 270 bottom
U$76  [#GND#0]  18.54,58.42 270 bottom
U$77  [QWIIC_RFID_TAG0]  18.29,48.01 270 bottom
U$78  SPARKX-LOGO2  [SPARKX-TINY]  28.96,44.26 0 top
U$79  SPARKX-LOGO3  [SPARKX-SMALL]  26.8,48.01 270 bottom
U$80  [#I�C#0]  29.72,62.61 270 bottom
U$81  [##GPO##0]  26.16,63.88 270 bottom
U$82  [#VEH#0]  26.16,58.42 270 bottom
U$83  [#GND#0]  31.75,58.42 270 bottom
U$84  [QWIIC_RFID_TAG0]  31.5,48.01 270 bottom
U$85  SPARKX-LOGO2  [SPARKX-TINY]  42.16,44.26 0 top
U$86  SPARKX-LOGO3  [SPARKX-SMALL]  40.01,48.01 270 bottom
U$87  [#I�C#0]  42.93,62.61 270 bottom
U$88  [##GPO##0]  39.37,63.88 270 bottom
U$89  [#VEH#0]  39.37,58.42 270 bottom
U$90  [#GND#0]  44.96,58.42 270 bottom
U$91  [QWIIC_RFID_TAG0]  44.7,48.01 270 bottom
U$92  SPARKX-LOGO2  [SPARKX-TINY]  55.37,44.26 0 top
U$93  SPARKX-LOGO3  [SPARKX-SMALL]  53.21,48.01 270 bottom
U$94  [#I�C#0]  56.13,62.61 270 bottom
U$95  [##GPO##0]  52.58,63.88 270 bottom
U$96  [#VEH#0]  52.58,58.42 270 bottom
U$97  [#GND#0]  58.17,58.42 270 bottom
U$98  [QWIIC_RFID_TAG0]  57.91,48.01 270 bottom
U$99  SPARKX-LOGO2  [SPARKX-TINY]  68.58,44.26 0 top
U$100  SPARKX-LOGO3  [SPARKX-SMALL]  66.42,48.01 270 bottom
U$101  [#I�C#0]  69.34,62.61 270 bottom
U$102  [##GPO##0]  65.79,63.88 270 bottom
U$103  [#VEH#0]  65.79,58.42 270 bottom
U$104  [#GND#0]  71.37,58.42 270 bottom
U$105  [QWIIC_RFID_TAG0]  71.12,48.01 270 bottom
U$106  SPARKX-LOGO2  [SPARKX-TINY]  81.79,44.26 0 top
U$107  SPARKX-LOGO3  [SPARKX-SMALL]  79.63,48.01 270 bottom
U$108  [#I�C#0]  82.55,62.61 270 bottom
U$109  [##GPO##0]  78.99,63.88 270 bottom
U$110  [#VEH#0]  78.99,58.42 270 bottom
U$111  [#GND#0]  84.58,58.42 270 bottom
U$112  [QWIIC_RFID_TAG0]  84.33,48.01 270 bottom
U$113  SPARKX-LOGO2  [SPARKX-TINY]  95,44.26 0 top
U$114  SPARKX-LOGO3  [SPARKX-SMALL]  92.84,48.01 270 bottom
U$115  [#I�C#0]  95.76,62.61 270 bottom
U$116  [##GPO##0]  92.2,63.88 270 bottom
U$117  [#VEH#0]  92.2,58.42 270 bottom
U$118  [#GND#0]  97.79,58.42 270 bottom
U$119  [QWIIC_RFID_TAG0]  97.54,48.01 270 bottom
U$120  SPARKX-LOGO2  [SPARKX-TINY]  108.2,44.26 0 top
U$121  SPARKX-LOGO3  [SPARKX-SMALL]  106.05,48.01 270 bottom
U$122  [#I�C#0]  108.97,62.61 270 bottom
U$123  [##GPO##0]  105.41,63.88 270 bottom
U$124  [#VEH#0]  105.41,58.42 270 bottom
U$125  [#GND#0]  111,58.42 270 bottom
U$126  [QWIIC_RFID_TAG0]  110.74,48.01 270 bottom
U$127  SPARKX-LOGO2  [SPARKX-TINY]  121.41,44.26 0 top
U$128  SPARKX-LOGO3  [SPARKX-SMALL]  119.25,48.01 270 bottom
U$129  [#I�C#0]  122.17,62.61 270 bottom
U$130  [##GPO##0]  118.62,63.88 270 bottom
U$131  [#VEH#0]  118.62,58.42 270 bottom
U$132  [#GND#0]  124.21,58.42 270 bottom
U$133  [QWIIC_RFID_TAG0]  123.95,48.01 270 bottom
U$134  SPARKX-LOGO2  [SPARKX-TINY]  134.62,44.26 0 top
U$135  SPARKX-LOGO3  [SPARKX-SMALL]  132.46,48.01 270 bottom
U$136  [#I�C#0]  135.38,62.61 270 bottom
U$137  [##GPO##0]  131.83,63.88 270 bottom
U$138  [#VEH#0]  131.83,58.42 270 bottom
U$139  [#GND#0]  137.41,58.42 270 bottom
U$140  [QWIIC_RFID_TAG0]  137.16,48.01 270 bottom
VEH  [1X01_1MM_NO_SILK]  13.21,22.1 0 top
VEH1  [1X01_1MM_NO_SILK]  26.42,22.1 0 top
VEH2  [1X01_1MM_NO_SILK]  39.62,22.1 0 top
VEH3  [1X01_1MM_NO_SILK]  52.83,22.1 0 top
VEH4  [1X01_1MM_NO_SILK]  66.04,22.1 0 top
VEH5  [1X01_1MM_NO_SILK]  79.25,22.1 0 top
VEH6  [1X01_1MM_NO_SILK]  92.46,22.1 0 top
VEH7  [1X01_1MM_NO_SILK]  105.66,22.1 0 top
VEH8  [1X01_1MM_NO_SILK]  118.87,22.1 0 top
VEH9  [1X01_1MM_NO_SILK]  132.08,22.1 0 top
VEH10  [1X01_1MM_NO_SILK]  13.21,54.36 0 top
VEH11  [1X01_1MM_NO_SILK]  26.42,54.36 0 top
VEH12  [1X01_1MM_NO_SILK]  39.62,54.36 0 top
VEH13  [1X01_1MM_NO_SILK]  52.83,54.36 0 top
VEH14  [1X01_1MM_NO_SILK]  66.04,54.36 0 top
VEH15  [1X01_1MM_NO_SILK]  79.25,54.36 0 top
VEH16  [1X01_1MM_NO_SILK]  92.46,54.36 0 top
VEH17  [1X01_1MM_NO_SILK]  105.66,54.36 0 top
VEH18  [1X01_1MM_NO_SILK]  118.87,54.36 0 top
VEH19  [1X01_1MM_NO_SILK]  132.08,54.36 0 top

## Library data of the parts
3V1-3V20 !GPO! !GPO!1-!GPO!19 GND GND1-GND19 GND. GND.1-GND.19 SCL SCL1-SCL19 SDA SDA1-SDA19 VEH VEH1-VEH19 = SparkFun-Connectors
ANT ANT1-ANT19 = SparkFun-RF; PROD_ID: ANT-16333
C1 C5 C8 C11 C14 C17 C20 C23 C26 C29 C32 C35 C38 C41 C44 C47 C50 C53 C56 C59 = SparkFun-Capacitors; PROD_ID: CAP-14993
C2 C4 C7 C10 C13 C16 C19 C22 C25 C28 C31 C34 C37 C40 C43 C46 C49 C52 C55 C58 = SparkFun-Capacitors; PROD_ID: CAP-14232
C3 C6 C9 C12 C15 C18 C21 C24 C27 C30 C33 C36 C39 C42 C45 C48 C51 C54 C57 C60 = SparkFun-Capacitors; PROD_ID: CAP-14362
E$1-E$4 FD1-FD80 LOGO1-LOGO20 = SparkFun-Aesthetics
E$5 E$6 = SparkFun-Retired
H1-H20 = SparkFun-Hardware
J1-J20 = SparkFun-Connectors; PROD_ID: CONN-13694
JP1-JP20 = SparkFun-Jumpers
R1-R40 = SparkFun-Resistors; PROD_ID: RES-14341
U1-U20 = SparkFun-RF; PROD_ID: IC-16315
U$1 U$7 U$8 U$14 U$15 U$20 U$22 U$23 U$29 U$30 U$36 U$37 U$43 U$44 U$50 U$51 U$57 U$58 U$64 U$65 U$71 U$72 U$78 U$79 U$85 U$86 U$92 U$93 U$99 U$100 U$106 U$107 U$113 U$114 U$120 U$121 U$127 U$128 U$134 U$135 = SparkX
U$2-U$6 U$9-U$13 U$16-U$19 U$21 U$24-U$28 U$31-U$35 U$38-U$42 U$45-U$49 U$52-U$56 U$59-U$63 U$66-U$70 U$73-U$77 U$80-U$84 U$87-U$91 U$94-U$98 U$101-U$105 U$108-U$112 U$115-U$119 U$122-U$126 U$129-U$133 U$136-U$140 = output

## Nets
3.3V: 3V3.1 C1.1 C2.1 J1.2 JP1.2 U1.8
3.3V1: 3V1.1 C4.1 C5.1 J2.2 JP2.2 U2.8
3.3V2: 3V2.1 C7.1 C8.1 J3.2 JP3.2 U3.8
3.3V3: 3V4.1 C10.1 C11.1 J4.2 JP4.2 U4.8
3.3V4: 3V5.1 C13.1 C14.1 J5.2 JP5.2 U5.8
3.3V5: 3V6.1 C16.1 C17.1 J6.2 JP6.2 U6.8
3.3V6: 3V7.1 C19.1 C20.1 J7.2 JP7.2 U7.8
3.3V7: 3V8.1 C22.1 C23.1 J8.2 JP8.2 U8.8
3.3V8: 3V9.1 C25.1 C26.1 J9.2 JP9.2 U9.8
3.3V9: 3V10.1 C28.1 C29.1 J10.2 JP10.2 U10.8
3.3V10: 3V11.1 C31.1 C32.1 J11.2 JP11.2 U11.8
3.3V11: 3V12.1 C34.1 C35.1 J12.2 JP12.2 U12.8
3.3V12: 3V13.1 C37.1 C38.1 J13.2 JP13.2 U13.8
3.3V13: 3V14.1 C40.1 C41.1 J14.2 JP14.2 U14.8
3.3V14: 3V15.1 C43.1 C44.1 J15.2 JP15.2 U15.8
3.3V15: 3V16.1 C46.1 C47.1 J16.2 JP16.2 U16.8
3.3V16: 3V17.1 C49.1 C50.1 J17.2 JP17.2 U17.8
3.3V17: 3V18.1 C52.1 C53.1 J18.2 JP18.2 U18.8
3.3V18: 3V19.1 C55.1 C56.1 J19.2 JP19.2 U19.8
3.3V19: 3V20.1 C58.1 C59.1 J20.2 JP20.2 U20.8
!GPO!: !GPO!.1 U1.7
!GPO!1: !GPO!1.1 U2.7
!GPO!2: !GPO!2.1 U3.7
!GPO!3: !GPO!3.1 U4.7
!GPO!4: !GPO!4.1 U5.7
!GPO!5: !GPO!5.1 U6.7
!GPO!6: !GPO!6.1 U7.7
!GPO!7: !GPO!7.1 U8.7
!GPO!8: !GPO!8.1 U9.7
!GPO!9: !GPO!9.1 U10.7
!GPO!10: !GPO!10.1 U11.7
!GPO!11: !GPO!11.1 U12.7
!GPO!12: !GPO!12.1 U13.7
!GPO!13: !GPO!13.1 U14.7
!GPO!14: !GPO!14.1 U15.7
!GPO!15: !GPO!15.1 U16.7
!GPO!16: !GPO!16.1 U17.7
!GPO!17: !GPO!17.1 U18.7
!GPO!18: !GPO!18.1 U19.7
!GPO!19: !GPO!19.1 U20.7
GND: C1.2 C2.2 GND.1 GND..1 J1.1 U1.4
GND1: C4.2 C5.2 GND1.1 GND.1.1 J2.1 U2.4
GND2: C7.2 C8.2 GND2.1 GND.2.1 J3.1 U3.4
GND3: C10.2 C11.2 GND3.1 GND.3.1 J4.1 U4.4
GND4: C13.2 C14.2 GND4.1 GND.4.1 J5.1 U5.4
GND5: C16.2 C17.2 GND5.1 GND.5.1 J6.1 U6.4
GND6: C19.2 C20.2 GND6.1 GND.6.1 J7.1 U7.4
GND7: C22.2 C23.2 GND7.1 GND.7.1 J8.1 U8.4
GND8: C25.2 C26.2 GND8.1 GND.8.1 J9.1 U9.4
GND9: C28.2 C29.2 GND9.1 GND.9.1 J10.1 U10.4
GND10: C31.2 C32.2 GND10.1 GND.10.1 J11.1 U11.4
GND11: C34.2 C35.2 GND11.1 GND.11.1 J12.1 U12.4
GND12: C37.2 C38.2 GND12.1 GND.12.1 J13.1 U13.4
GND13: C40.2 C41.2 GND13.1 GND.13.1 J14.1 U14.4
GND14: C43.2 C44.2 GND14.1 GND.14.1 J15.1 U15.4
GND15: C46.2 C47.2 GND15.1 GND.15.1 J16.1 U16.4
GND16: C49.2 C50.2 GND16.1 GND.16.1 J17.1 U17.4
GND17: C52.2 C53.2 GND17.1 GND.17.1 J18.1 U18.4
GND18: C55.2 C56.2 GND18.1 GND.18.1 J19.1 U19.4
GND19: C58.2 C59.2 GND19.1 GND.19.1 J20.1 U20.4
N$1: ANT.2 C3.2 U1.3
N$2: ANT.1 C3.1 U1.2
N$3: JP1.3 R2.2
N$4: JP1.1 R1.2
N$5: ANT1.2 C6.2 U2.3
N$6: ANT1.1 C6.1 U2.2
N$7: JP2.3 R3.2
N$8: JP2.1 R4.2
N$9: ANT2.2 C9.2 U3.3
N$10: ANT2.1 C9.1 U3.2
N$11: JP3.3 R5.2
N$12: JP3.1 R6.2
N$13: ANT3.2 C12.2 U4.3
N$14: ANT3.1 C12.1 U4.2
N$15: JP4.3 R7.2
N$16: JP4.1 R8.2
N$17: ANT4.2 C15.2 U5.3
N$18: ANT4.1 C15.1 U5.2
N$19: JP5.3 R9.2
N$20: JP5.1 R10.2
N$21: ANT5.2 C18.2 U6.3
N$22: ANT5.1 C18.1 U6.2
N$23: JP6.3 R11.2
N$24: JP6.1 R12.2
N$25: ANT6.2 C21.2 U7.3
N$26: ANT6.1 C21.1 U7.2
N$27: JP7.3 R13.2
N$28: JP7.1 R14.2
N$29: ANT7.2 C24.2 U8.3
N$30: ANT7.1 C24.1 U8.2
N$31: JP8.3 R15.2
N$32: JP8.1 R16.2
N$33: ANT8.2 C27.2 U9.3
N$34: ANT8.1 C27.1 U9.2
N$35: JP9.3 R17.2
N$36: JP9.1 R18.2
N$37: ANT9.2 C30.2 U10.3
N$38: ANT9.1 C30.1 U10.2
N$39: JP10.3 R19.2
N$40: JP10.1 R20.2
N$41: ANT10.2 C33.2 U11.3
N$42: ANT10.1 C33.1 U11.2
N$43: JP11.3 R21.2
N$44: JP11.1 R22.2
N$45: ANT11.2 C36.2 U12.3
N$46: ANT11.1 C36.1 U12.2
N$47: JP12.3 R23.2
N$48: JP12.1 R24.2
N$49: ANT12.2 C39.2 U13.3
N$50: ANT12.1 C39.1 U13.2
N$51: JP13.3 R25.2
N$52: JP13.1 R26.2
N$53: ANT13.2 C42.2 U14.3
N$54: ANT13.1 C42.1 U14.2
N$55: JP14.3 R27.2
N$56: JP14.1 R28.2
N$57: ANT14.2 C45.2 U15.3
N$58: ANT14.1 C45.1 U15.2
N$59: JP15.3 R29.2
N$60: JP15.1 R30.2
N$61: ANT15.2 C48.2 U16.3
N$62: ANT15.1 C48.1 U16.2
N$63: JP16.3 R31.2
N$64: JP16.1 R32.2
N$65: ANT16.2 C51.2 U17.3
N$66: ANT16.1 C51.1 U17.2
N$67: JP17.3 R33.2
N$68: JP17.1 R34.2
N$69: ANT17.2 C54.2 U18.3
N$70: ANT17.1 C54.1 U18.2
N$71: JP18.3 R35.2
N$72: JP18.1 R36.2
N$73: ANT18.2 C57.2 U19.3
N$74: ANT18.1 C57.1 U19.2
N$75: JP19.3 R37.2
N$76: JP19.1 R38.2
N$77: ANT19.2 C60.2 U20.3
N$78: ANT19.1 C60.1 U20.2
N$79: JP20.3 R39.2
N$80: JP20.1 R40.2
SCL: J1.4 R1.1 SCL.1 U1.6
SCL1: J2.4 R4.1 SCL1.1 U2.6
SCL2: J3.4 R6.1 SCL2.1 U3.6
SCL3: J4.4 R8.1 SCL3.1 U4.6
SCL4: J5.4 R10.1 SCL4.1 U5.6
SCL5: J6.4 R12.1 SCL5.1 U6.6
SCL6: J7.4 R14.1 SCL6.1 U7.6
SCL7: J8.4 R16.1 SCL7.1 U8.6
SCL8: J9.4 R18.1 SCL8.1 U9.6
SCL9: J10.4 R20.1 SCL9.1 U10.6
SCL10: J11.4 R22.1 SCL10.1 U11.6
SCL11: J12.4 R24.1 SCL11.1 U12.6
SCL12: J13.4 R26.1 SCL12.1 U13.6
SCL13: J14.4 R28.1 SCL13.1 U14.6
SCL14: J15.4 R30.1 SCL14.1 U15.6
SCL15: J16.4 R32.1 SCL15.1 U16.6
SCL16: J17.4 R34.1 SCL16.1 U17.6
SCL17: J18.4 R36.1 SCL17.1 U18.6
SCL18: J19.4 R38.1 SCL18.1 U19.6
SCL19: J20.4 R40.1 SCL19.1 U20.6
SDA: J1.3 R2.1 SDA.1 U1.5
SDA1: J2.3 R3.1 SDA1.1 U2.5
SDA2: J3.3 R5.1 SDA2.1 U3.5
SDA3: J4.3 R7.1 SDA3.1 U4.5
SDA4: J5.3 R9.1 SDA4.1 U5.5
SDA5: J6.3 R11.1 SDA5.1 U6.5
SDA6: J7.3 R13.1 SDA6.1 U7.5
SDA7: J8.3 R15.1 SDA7.1 U8.5
SDA8: J9.3 R17.1 SDA8.1 U9.5
SDA9: J10.3 R19.1 SDA9.1 U10.5
SDA10: J11.3 R21.1 SDA10.1 U11.5
SDA11: J12.3 R23.1 SDA11.1 U12.5
SDA12: J13.3 R25.1 SDA12.1 U13.5
SDA13: J14.3 R27.1 SDA13.1 U14.5
SDA14: J15.3 R29.1 SDA14.1 U15.5
SDA15: J16.3 R31.1 SDA15.1 U16.5
SDA16: J17.3 R33.1 SDA16.1 U17.5
SDA17: J18.3 R35.1 SDA17.1 U18.5
SDA18: J19.3 R37.1 SDA18.1 U19.5
SDA19: J20.3 R39.1 SDA19.1 U20.5
VEH: U1.1 VEH.1
VEH1: U2.1 VEH1.1
VEH2: U3.1 VEH2.1
VEH3: U4.1 VEH3.1
VEH4: U5.1 VEH4.1
VEH5: U6.1 VEH5.1
VEH6: U7.1 VEH6.1
VEH7: U8.1 VEH7.1
VEH8: U9.1 VEH8.1
VEH9: U10.1 VEH9.1
VEH10: U11.1 VEH10.1
VEH11: U12.1 VEH11.1
VEH12: U13.1 VEH12.1
VEH13: U14.1 VEH13.1
VEH14: U15.1 VEH14.1
VEH15: U16.1 VEH15.1
VEH16: U17.1 VEH16.1
VEH17: U18.1 VEH17.1
VEH18: U19.1 VEH18.1
VEH19: U20.1 VEH19.1